# Allegro board usb-fpc-001-0119pm16.brd
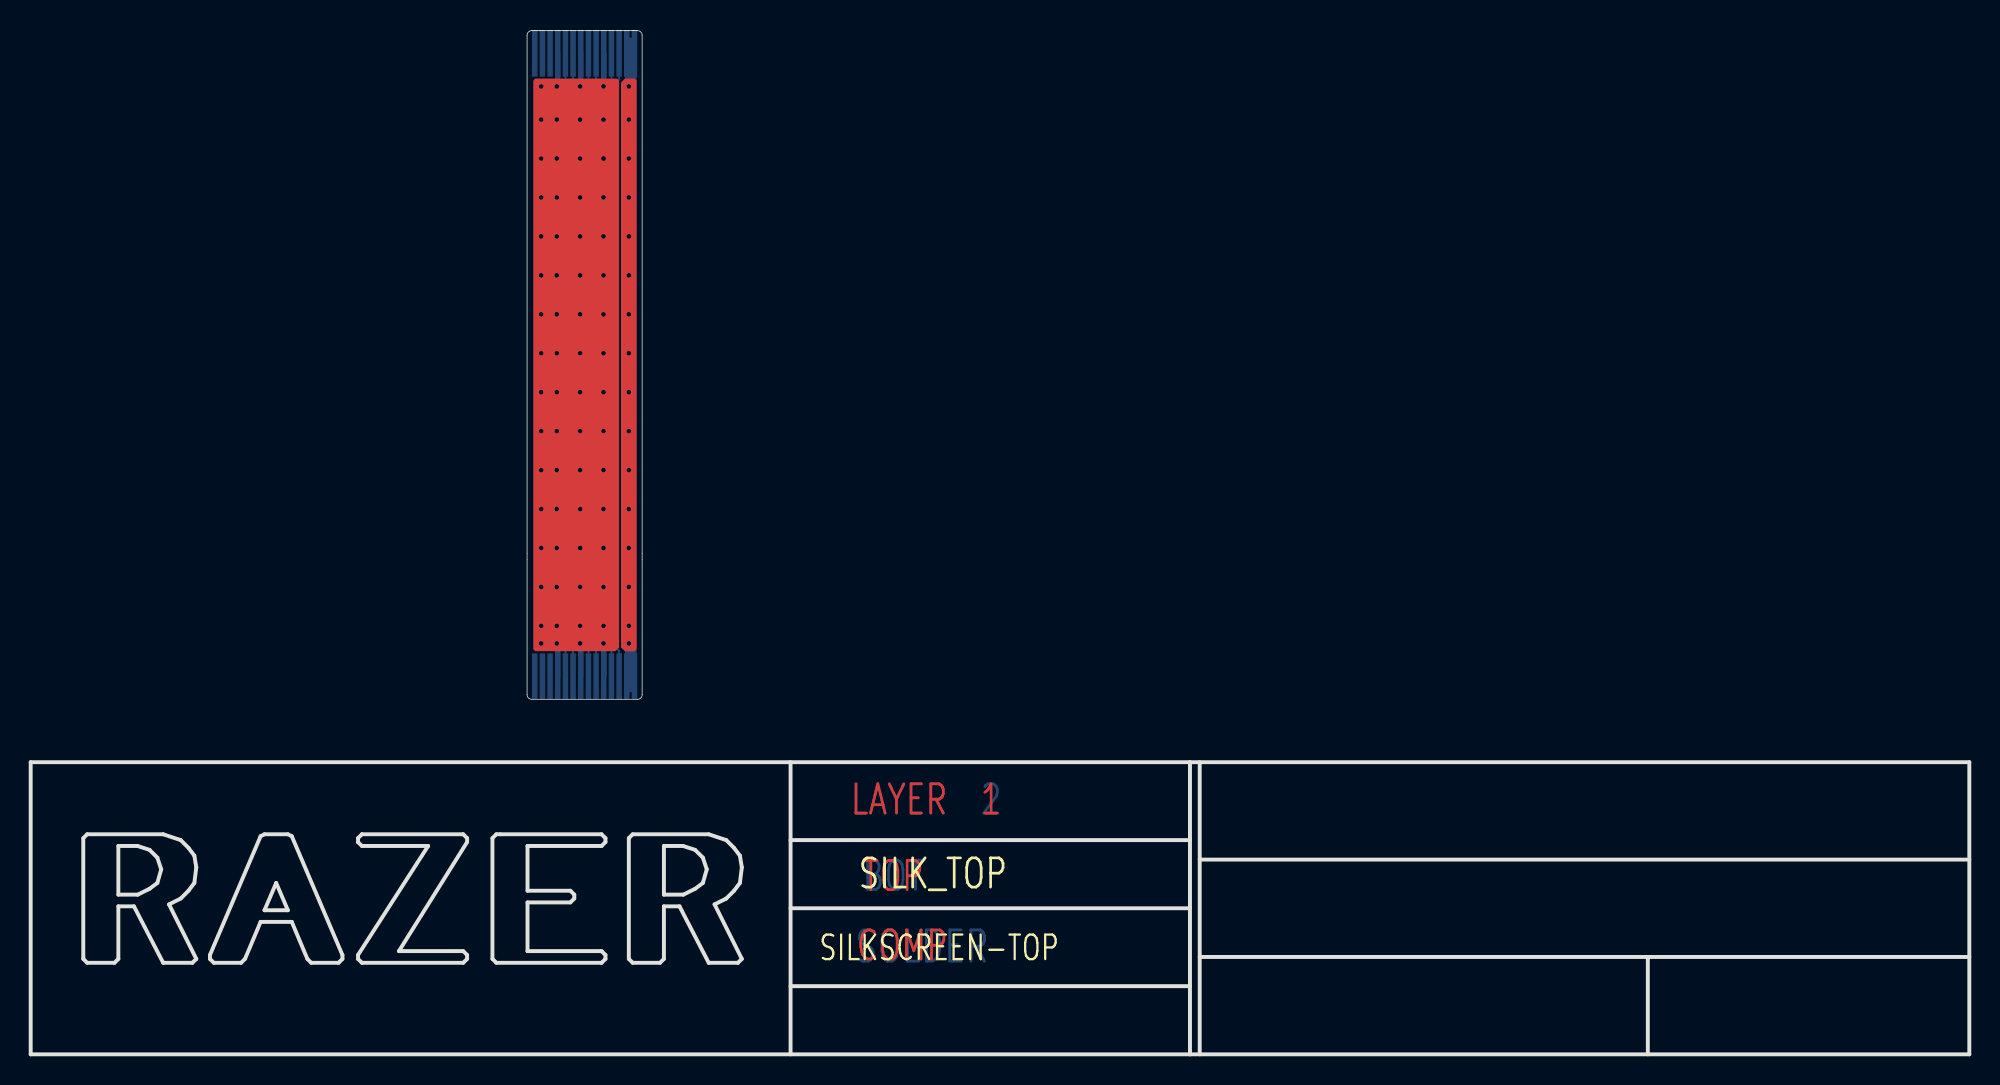
[diagram p0: board, top side]
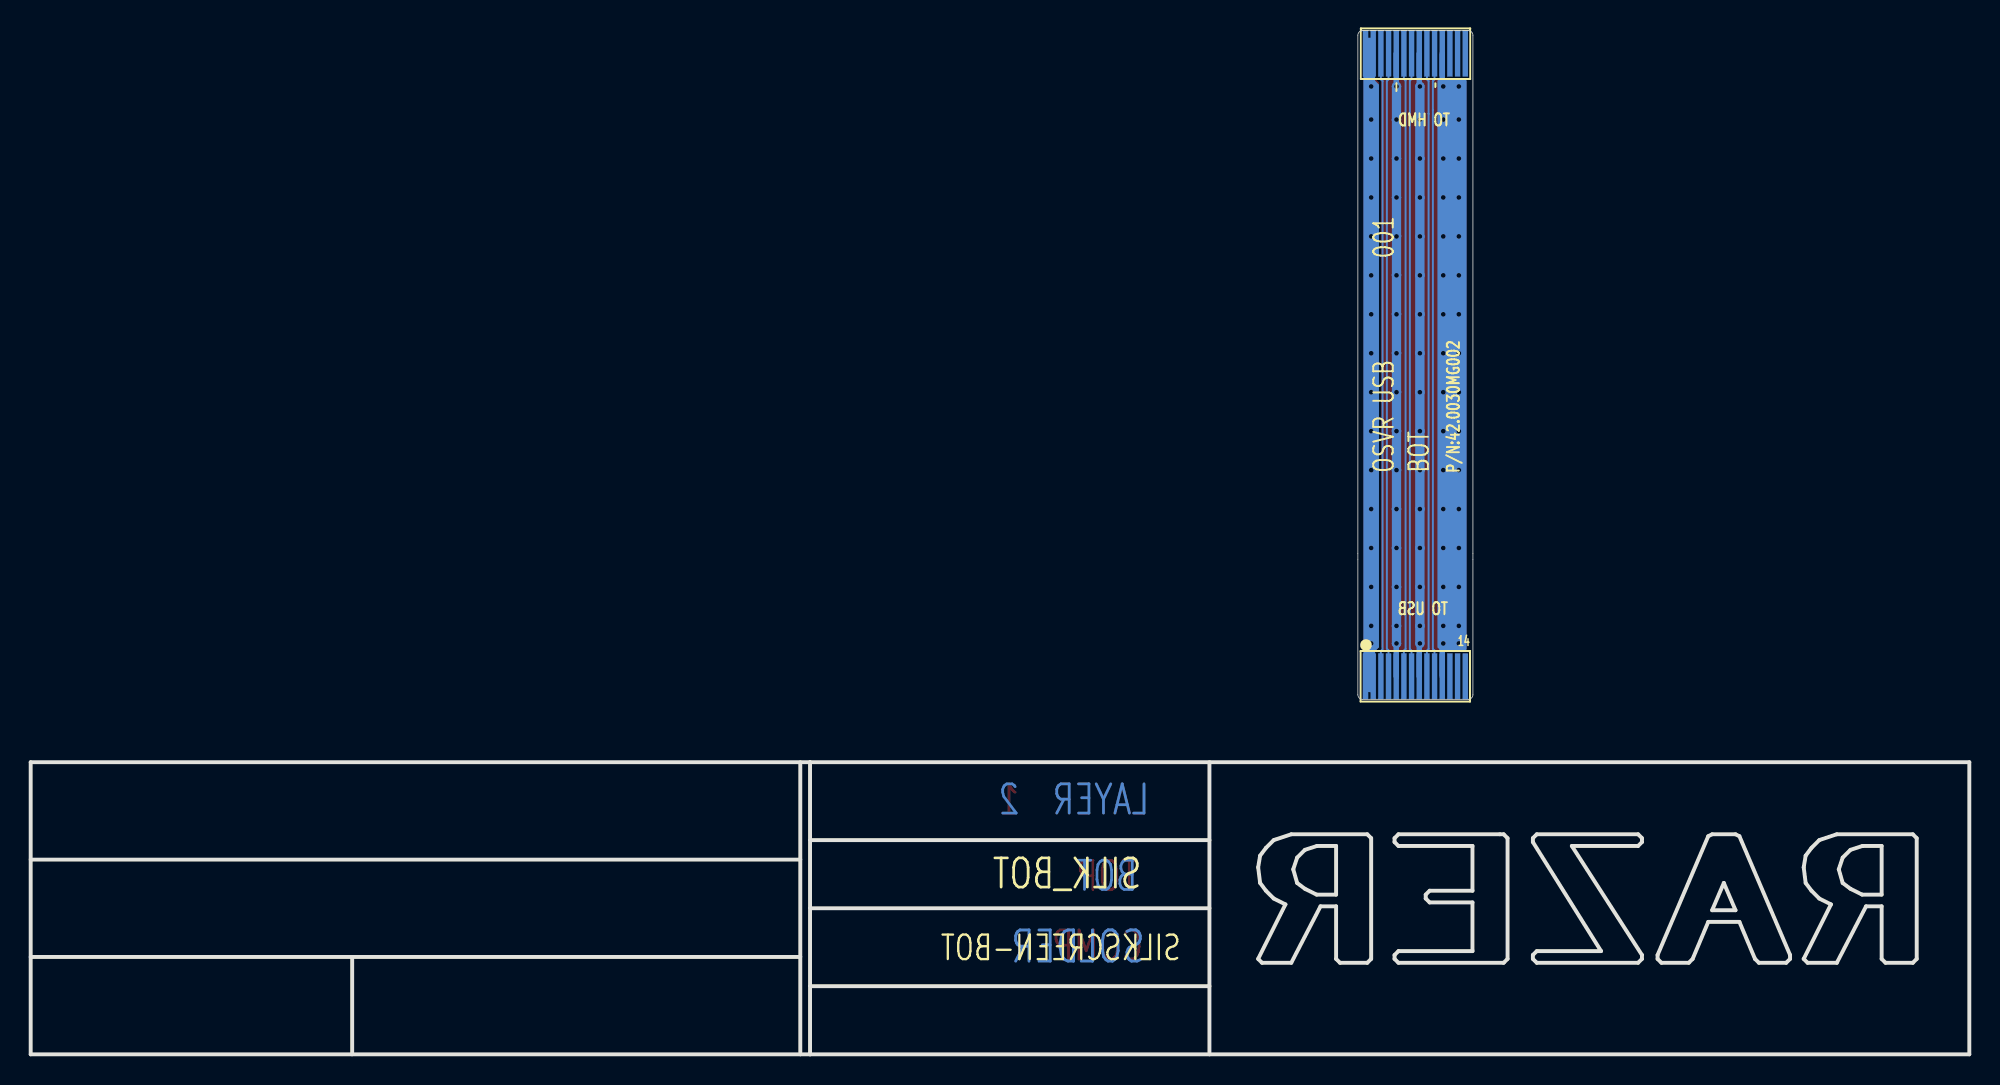
[diagram p1: board, bottom side, seen from below]

Outline 126.36 x 66.76 mm; copper layers: TOP, BOTTOM. Coordinates in mm from the lower left corner of the outline.
Outline path: 33.03,66.76 32.68,66.76 ; 33.53,66.76 33.18,66.76 ; 34.03,66.76 33.68,66.76 ; 34.53,66.76 34.18,66.76 ; 35.03,66.76 34.68,66.76 ; 35.53,66.76 35.18,66.76 ; 36.03,66.76 35.68,66.76 ; 36.53,66.76 36.18,66.76 ; 37.03,66.76 36.68,66.76 ; 37.53,66.76 37.18,66.76 ; 38.03,66.76 37.68,66.76 ; 38.53,66.76 38.18,66.76 ; 39.03,66.76 38.68,66.76 ; 39.53,66.76 39.18,66.76 ; 32.36,66.46 32.36,23.45 arc(32.44,23.24) 32.66,23.15 39.56,23.15 arc(39.77,23.24) 39.86,23.45 39.86,66.46 arc(39.77,66.67) 39.56,66.76 32.66,66.76 arc(32.44,66.67) 32.36,66.46

## Design rules (mm)
net group DIFFPAIR0: nets D+ D-
net group DIFFPAIR1: nets SSRX+ SSRX-
net group DIFFPAIR2: nets SSTX+ SSTX-

## Placement (name value [footprint] x y rotation side)
J1  ACES_14PIN_FPC  [ACES_50502-14-FPCPIN]  36.11 65.26 0 bottom
J2  ACES_14PIN_FPC  [ACES_50502-14-FPCPIN]  36.11 24.65 180 bottom
NOREF  -  []  0 0 0 top

## Library data of the parts
J1 = CON2_0
J2 = CON2_1

## Footprints (pads in the part's own frame, mm; a bottom-side part is the same pattern mirrored in y, then rotated)
ACES_50502-14-FPCPIN
  rect 0.356x2.997 smd: 1(-3.25,0) 2(-2.75,0) 3(-2.25,0) 4(-1.75,0) 5(-1.25,0) 6(-0.75,0) 7(-0.25,0) 8(0.25,0) 9(0.75,0) 10(1.25,0) 11(1.75,0) 12(2.25,0) 13(2.75,0) 14(3.25,0)

## Nets
5V: J1.13 J1.14 J2.1 J2.2
GND: J1.4 J1.7 J1.10 J2.5 J2.8 J2.11
D+: J1.11 J2.4
D-: J1.12 J2.3
SSRX+: J1.8 J2.7
SSRX-: J1.9 J2.6
SSTX+: J1.5 J2.10
SSTX-: J1.6 J2.9

Pads without a net: J1 1 2 3; J2 12 13 14

## Via types
v1: diameter 0.61, hole 0.305, TOP to BOTTOM, 80 vias

## Routing (per net, layer and track width the routed paths; a pad name or vN(x,y) marks a point on that pad's centre or on a via; arc(x,y) is an arc through that point)
5V:
  vias: v1(38.99,63.12) v1(38.99,60.96) v1(38.99,58.42) v1(38.99,55.88) v1(38.99,53.34) v1(38.99,50.8) v1(38.99,48.26) v1(38.99,45.72) v1(38.99,43.18) v1(38.99,40.64) v1(38.99,38.1) v1(38.99,35.56) v1(38.99,33.02) v1(38.99,30.48) v1(38.99,27.94) v1(38.99,26.8)
GND: length 85.6
  BOTTOM w0.356: J2.5 37.36,26.78 v1(37.34,26.8) ; v1(34.29,26.8) 34.36,26.74 J2.11 ; J1.7 35.86,63.16 v1(35.81,63.12) ; J1.4 34.36,63.18 v1(34.29,63.12) ; v1(35.81,26.8) 35.86,26.75 J2.8 ; v1(37.34,63.12) 37.36,63.14 J1.10
  BOTTOM w0.61: v1(35.81,63.12) v1(35.81,60.96) v1(35.81,58.42) v1(35.81,55.88) v1(35.81,53.34) v1(35.81,50.8) v1(35.81,48.26) v1(35.81,45.72) v1(35.81,43.18) v1(35.81,40.64) v1(35.81,38.1) v1(35.81,35.56) v1(35.81,33.02) v1(35.81,30.48) v1(35.81,27.94) v1(35.81,26.8) ; v1(37.34,63.12) v1(37.34,60.96) v1(37.34,58.42) v1(37.34,55.88) v1(37.34,53.34) v1(37.34,50.8) v1(37.34,48.26) v1(37.34,45.72) v1(37.34,43.18) v1(37.34,40.64) v1(37.34,38.1) v1(37.34,35.56) v1(37.34,33.02) v1(37.34,30.48) v1(37.34,27.94) v1(37.34,26.8)
  vias: v1(33.27,63.12) v1(33.27,60.96) v1(33.27,58.42) v1(33.27,55.88) v1(33.27,53.34) v1(33.27,50.8) v1(33.27,48.26) v1(33.27,45.72) v1(33.27,43.18) v1(33.27,40.64) v1(33.27,38.1) v1(33.27,35.56) v1(33.27,33.02) v1(33.27,30.48) v1(33.27,27.94) v1(33.27,26.8) v1(34.29,60.96) v1(34.29,58.42) v1(34.29,55.88) v1(34.29,53.34) v1(34.29,50.8) v1(34.29,48.26) v1(34.29,45.72) v1(34.29,43.18) v1(34.29,40.64) v1(34.29,38.1) v1(34.29,35.56) v1(34.29,33.02) v1(34.29,30.48) v1(34.29,27.94)
D+: length 40.7
  BOTTOM w0.127: J1.11 37.86,63.59 37.97,63.48 37.97,26.45 37.86,26.34 J2.4
D-: length 40.7
  BOTTOM w0.127: J1.12 38.36,63.59 38.25,63.48 38.25,26.42 38.36,26.31 J2.3
SSRX+: length 40.7
  BOTTOM w0.127: J2.7 36.36,26.32 36.47,26.43 36.47,63.5 36.36,63.61 J1.8
SSRX-: length 40.7
  BOTTOM w0.127: J1.9 36.86,63.61 36.75,63.5 36.75,26.43 36.86,26.32 J2.6
SSTX+: length 40.7
  BOTTOM w0.127: J1.5 34.86,63.59 34.97,63.48 34.97,61.6 34.97,61.59 34.97,26.43 34.86,26.32 J2.10
SSTX-: length 40.7
  BOTTOM w0.127: J1.6 35.36,63.59 35.25,63.48 35.25,61.34 35.25,61.34 35.25,26.43 35.36,26.32 J2.9

## Copper pours and planes (outline as drawn; the poured copper is in the pictures)
5V on TOP (solid shape): 39.5,63.5 39.5,26.42 39.37,26.29 38.73,26.29 38.48,26.54 38.48,63.37 38.73,63.63 39.37,63.63
5V on BOTTOM (solid shape): 39.5,66.17 39.5,23.75 39.37,23.62 38.86,23.62 38.73,23.75 38.73,26.29 38.48,26.54 38.48,63.25 38.73,63.5 38.73,66.17 38.86,66.29 39.37,66.29
GND on TOP (solid shape): 38.35,63.5 38.35,26.54 38.1,26.29 32.89,26.29 32.77,26.42 32.77,63.5 32.89,63.63 38.23,63.63
GND on BOTTOM (solid shape): 34.67,63.5 34.67,26.54 34.42,26.29 32.89,26.29 32.77,26.42 32.77,63.5 32.89,63.63 34.54,63.63

## Text on the board
Ref Des/Silkscreen Bottom: TO HMD | TO USB | P/N:42.0030MG002 | BOT | 001 | OSVR USB
Board Geometry/Outline: 1.USB SIGNALS IS YELLOW 5:6 MIL DIFFERENTIAL 90 OHM +/- 10% | TRACE:SPACE
DIMENSION: Pin | 1 | Pin 1 | 3.00 Mix. | 0.50\Fgdt;{\Fgdt;`}\Fcgomg.ttf;0.05 | 0.35 | 7.50\Fgdt;{\Fgdt;`}\Fcgomg.ttf;0.05 | 6.50\Fgdt;{\Fgdt;`}\Fcgomg.ttf;0.05
BODY_CENTER: FIGURE | SIZE | 12.0 | DRILL CHART: TOP to BOTTOM | ALL UNITS ARE IN MILS | PLATED | QTY | 80
DXF_1231-BOT: Pin | 1
